# Altium PCB main.PcbDoc (part 1 of 2)
Units mm, origin at the board's own origin, x right, y up, seen from the top; angles counter-clockwise.
Board outline 136 x 119 mm, 2 copper layers (Top Layer, Bottom Layer); 167 components, 134 nets, 513 pads, 251 vias.
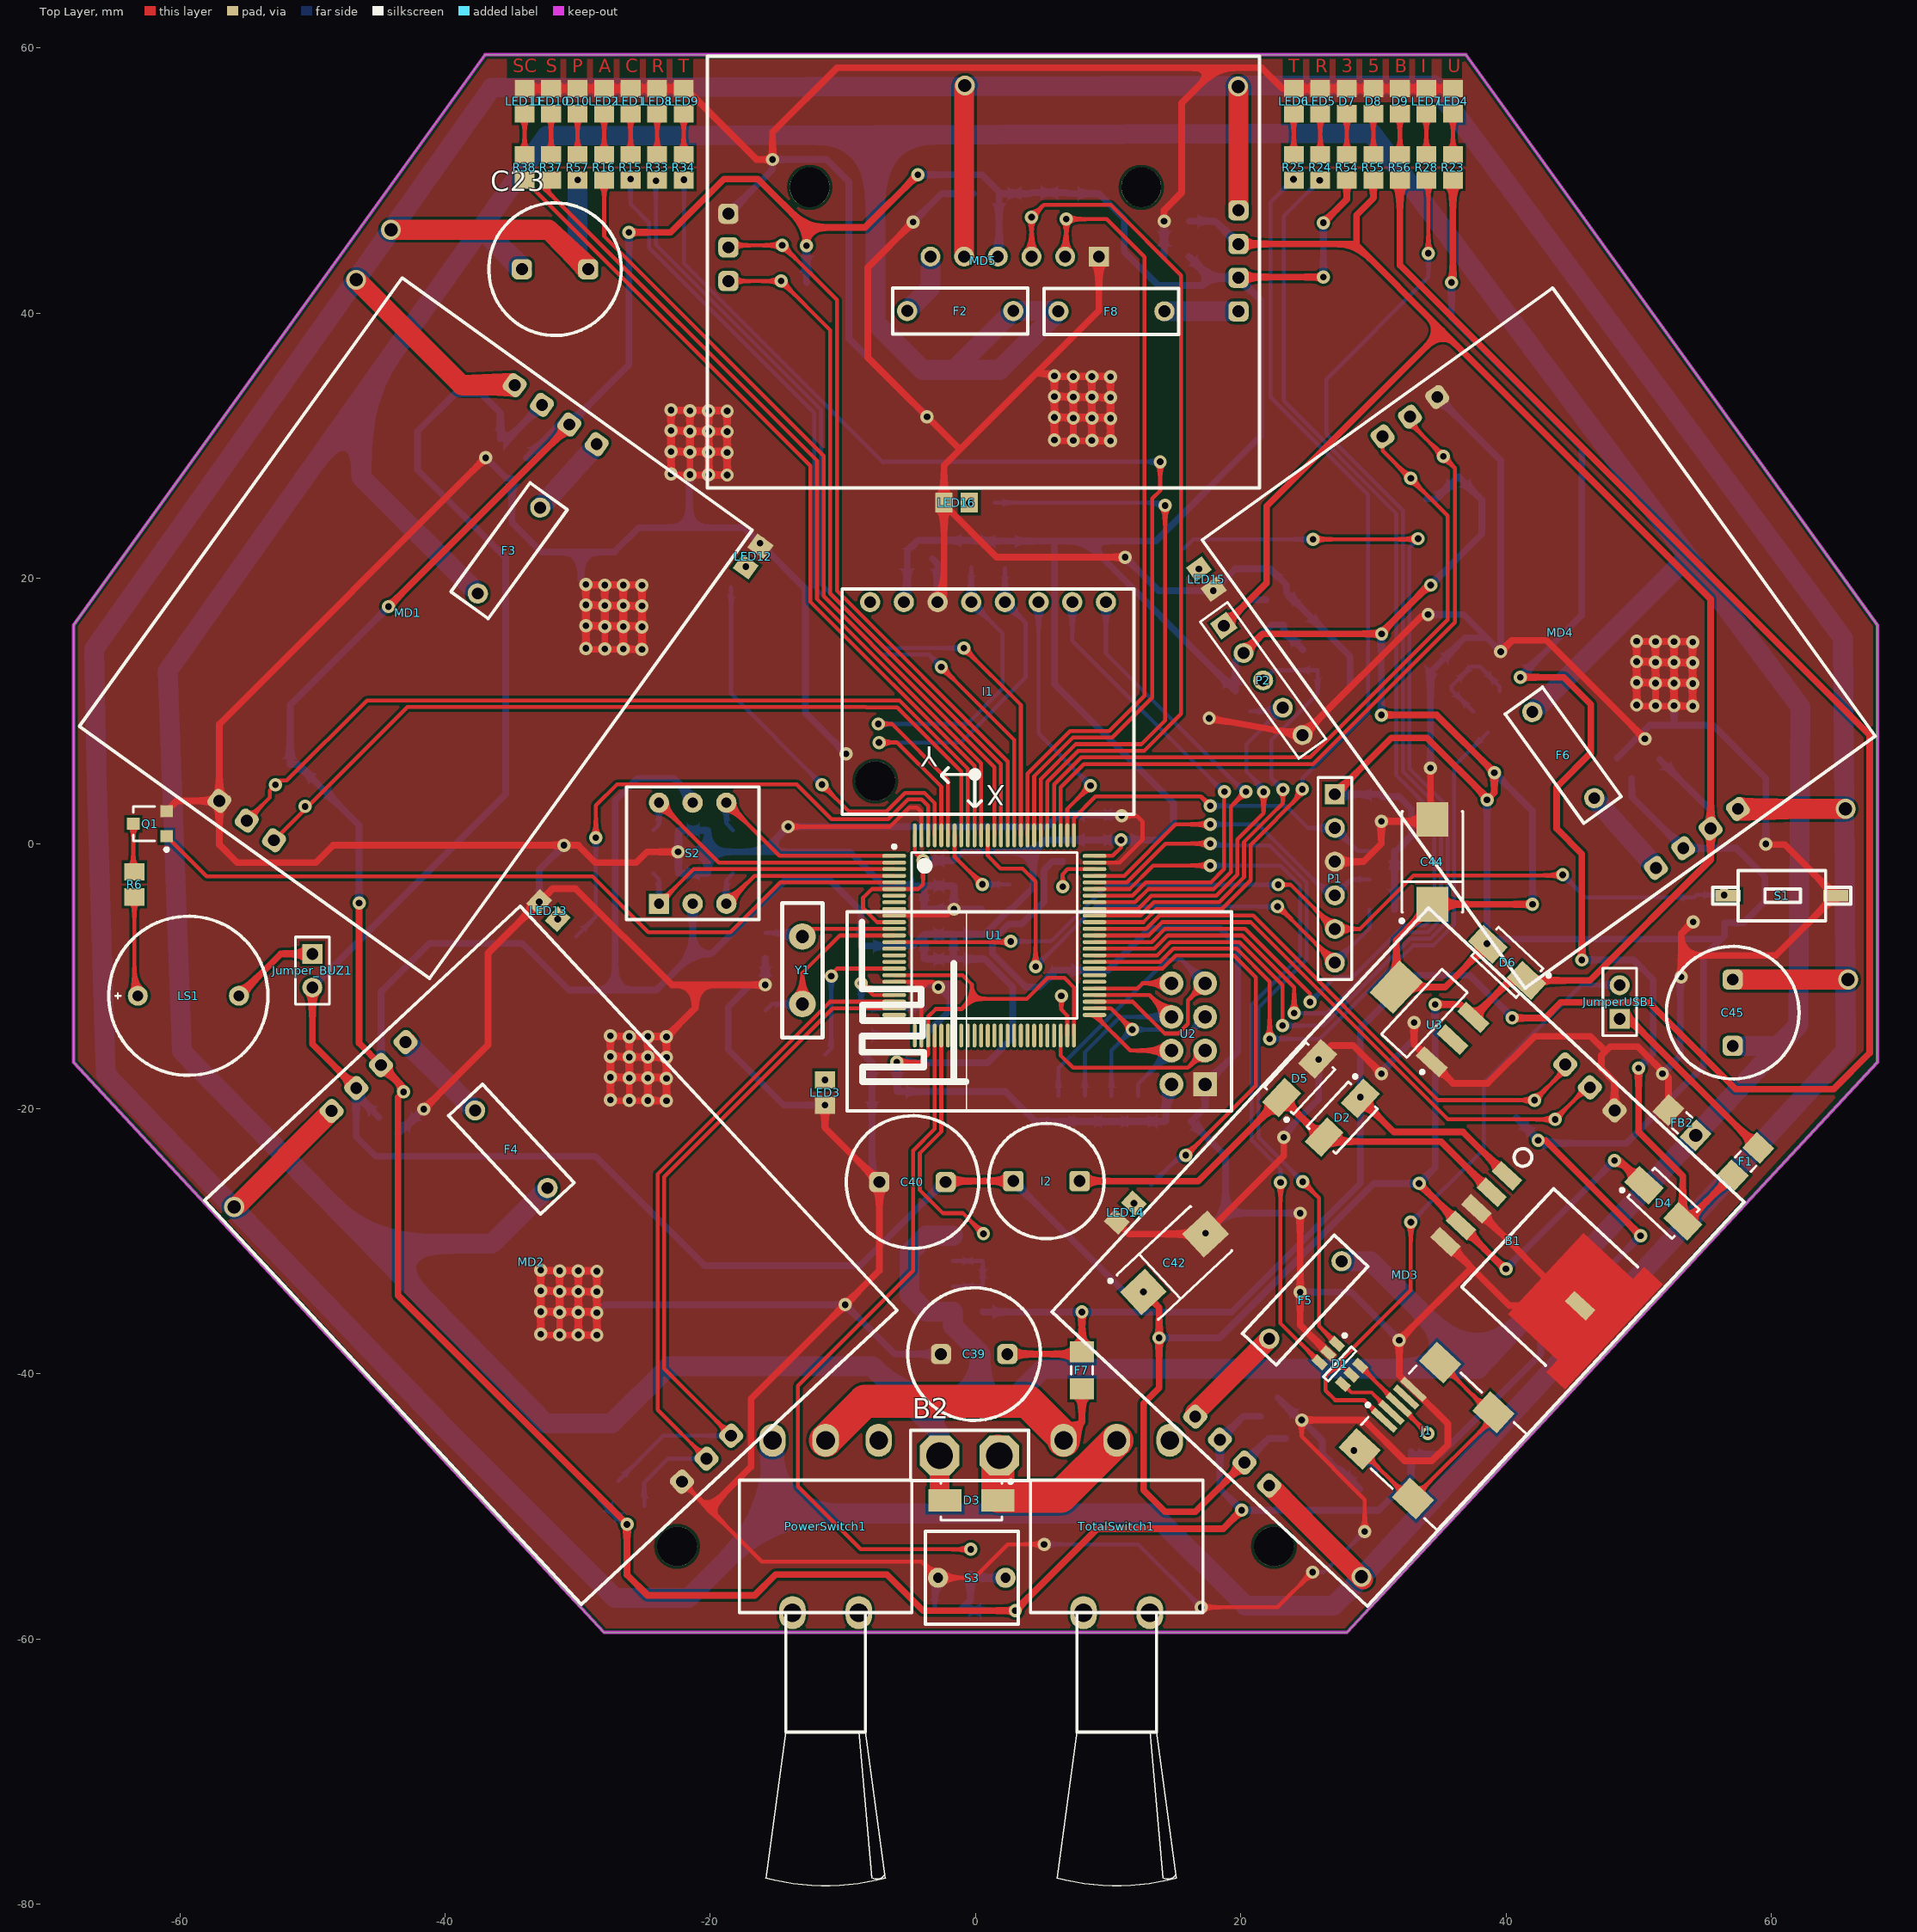
[diagram p0: Top Layer view]
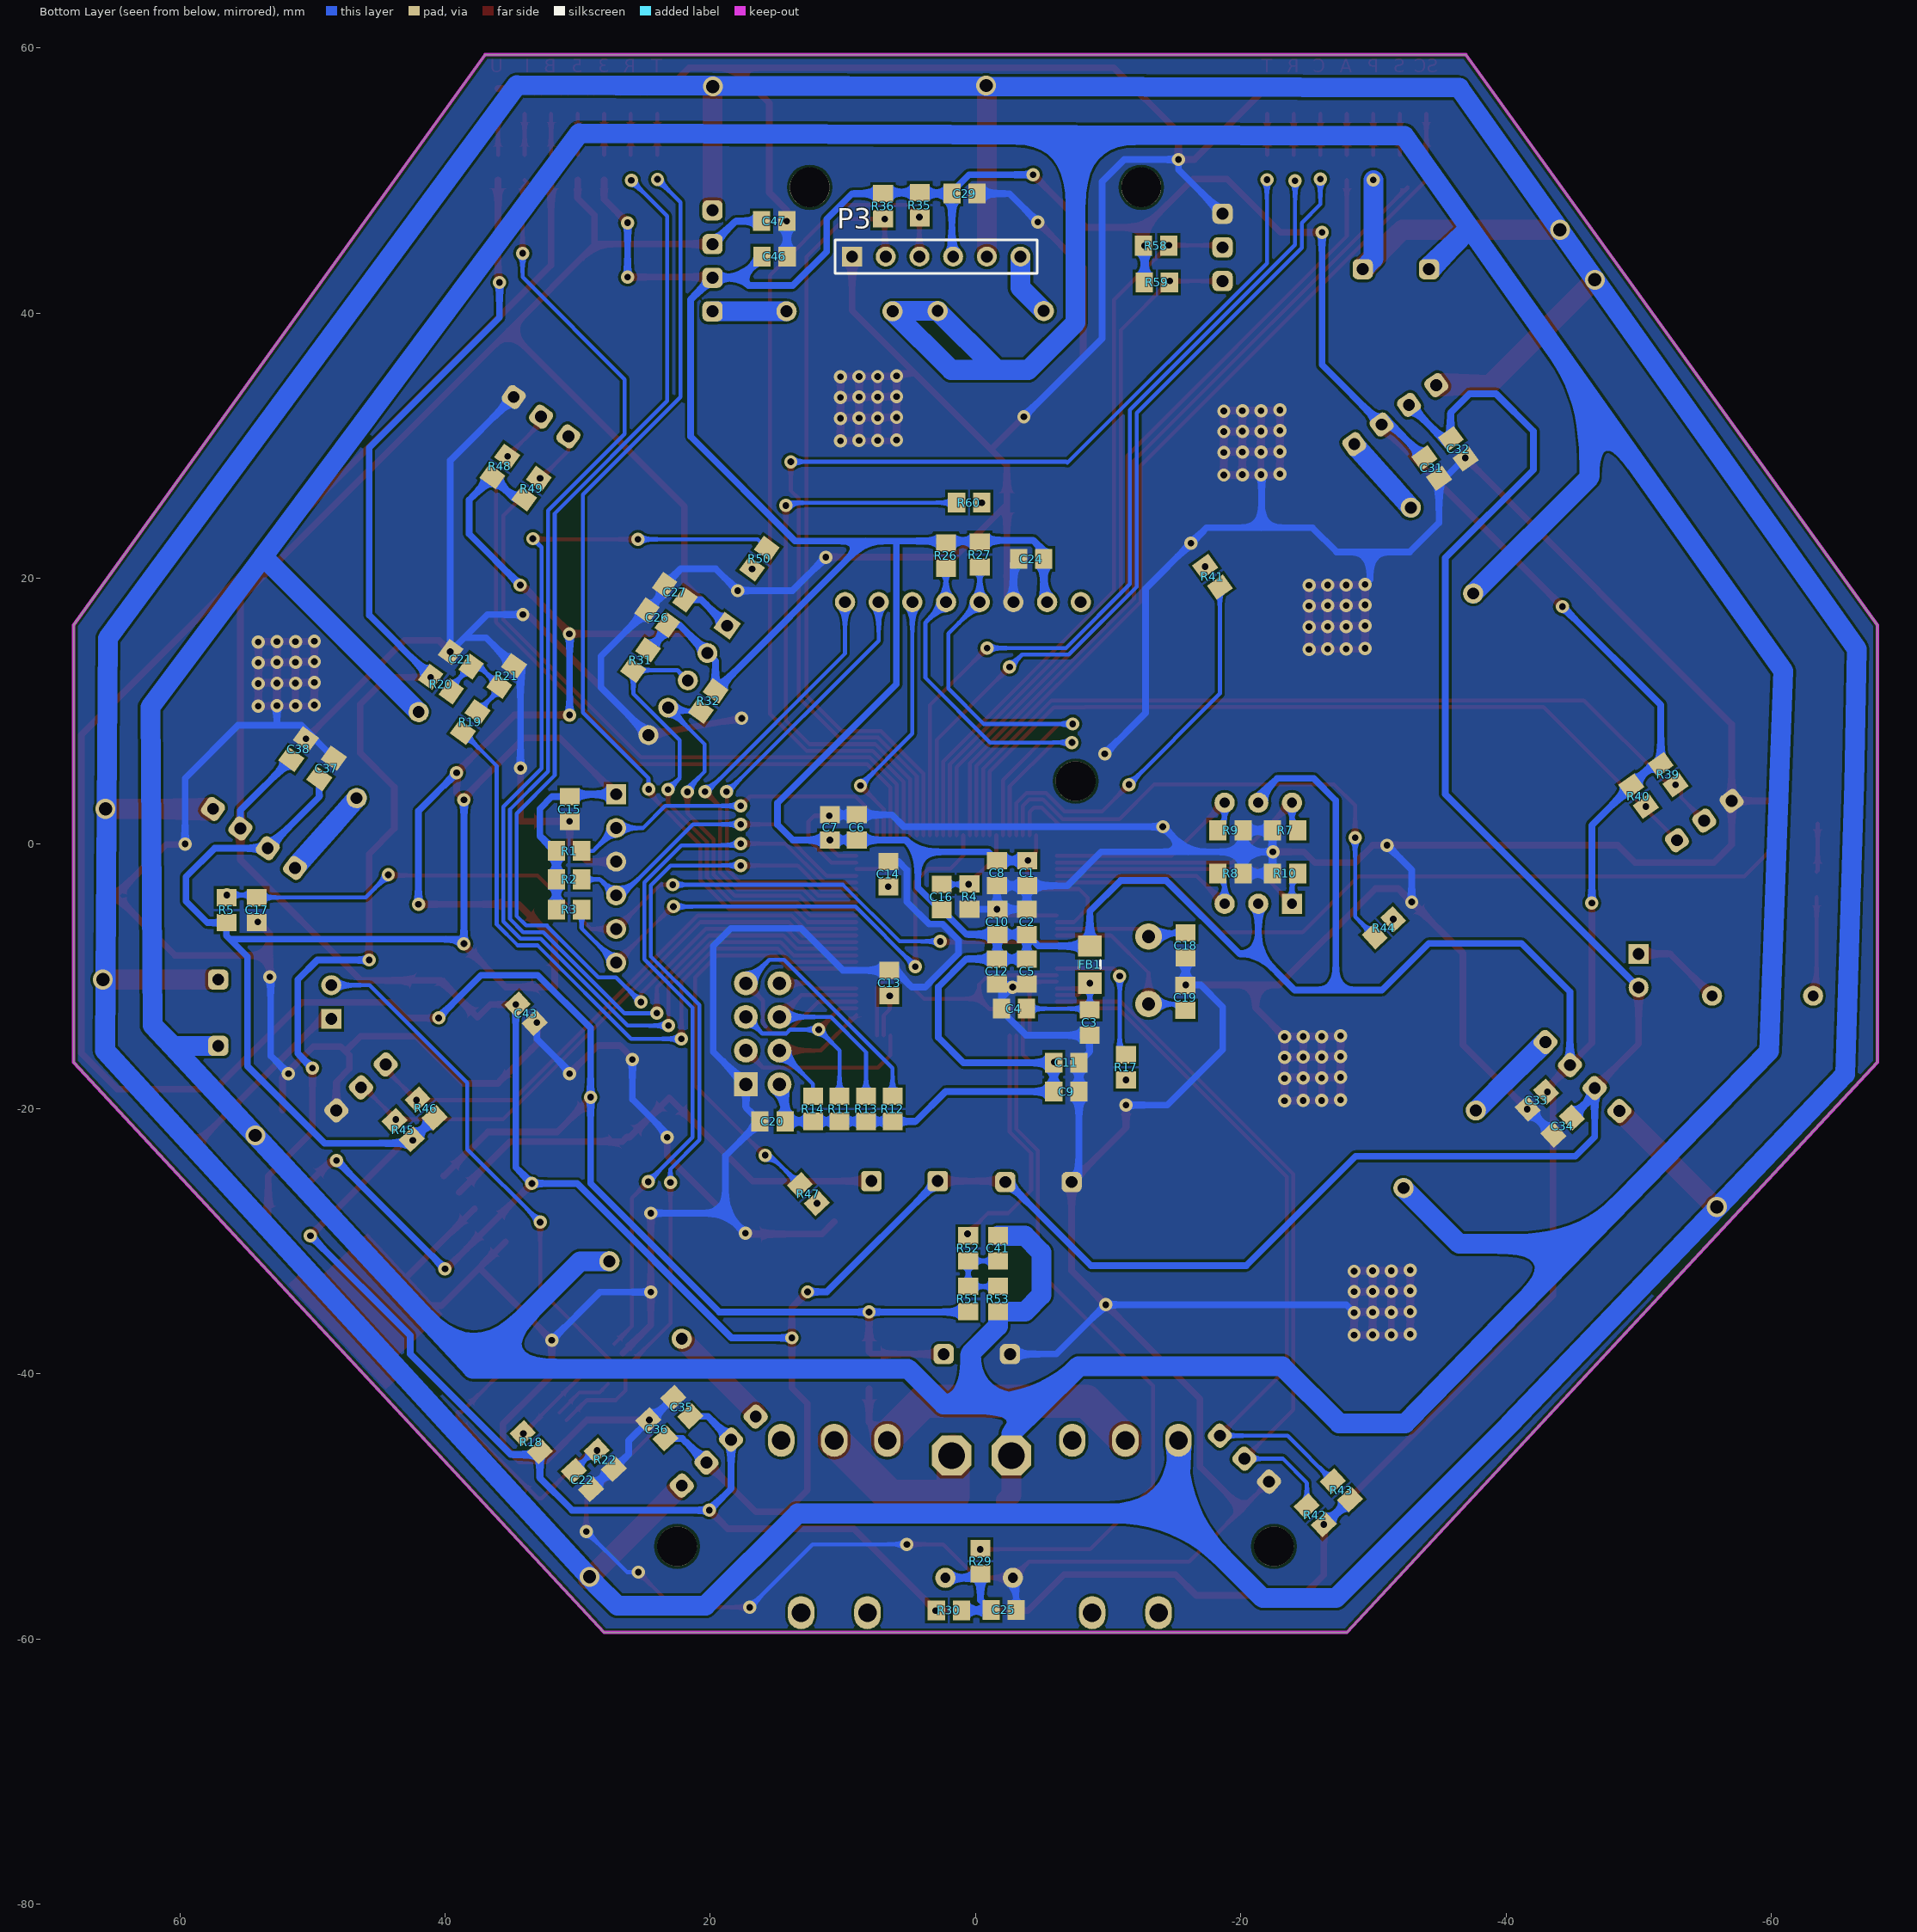
[diagram p1: Bottom Layer view, seen from below]

## Layer stack, top to bottom
Top Solder: solder mask 0.0102, Solder Resist, Dk 3.5
Top Layer: signal copper 0.0356
Dielectric 1: dielectric 0.32, FR-4, Dk 4.8
Bottom Layer: signal copper 0.0356
Bottom Solder: solder mask 0.0102, Solder Resist, Dk 3.5

## Board outline
-68,-16.5 -68,16.5 -36.975,59.5 36.975,59.5 68,16.5 68,-16.5 28,-59.5 -28,-59.5

## Design rules (kind name [scope] priority, off if disabled: settings)
Clearance [All] p1: gap=0.2
ComponentClearance [All] p1 off: gap=0.254 collisioncheckmode=3 verticalgap=0.254 showdistances=FALSE
Height [All] p1 off: minheight=0 maxheight=25.4 prefheight=12.7
PlaneConnect [All] p1: planeconnectstyle=Direct reliefexpansion=0.508 reliefentries=4 reliefconductorwidth=0.254 reliefairgap=0.254
PolygonConnect [All] p1: connectstyle=Direct reliefconductorwidth=0.254 reliefentries=4 polygonreliefangle="90 Angle" airgapwidth=0.254
RoutingVias [All] p1: holewidth=0.5 width=1 viastyle="Through Hole" minholewidth=0.5 minwidth=1 maxholewidth=1 maxwidth=1.5
SolderMaskExpansion [All] p1: expansion=0.102
Width Width_2 [InNet('3.3V')] p1: maxlimit=0.5 minlimit=0.3 preferedwidth=0.5
Width Width_1 [InNet('5V')] p2: maxlimit=0.5 minlimit=0.5 preferedwidth=0.5
Width [All] p3: maxlimit=2.5 minlimit=0.254 preferedwidth=0.254
27 further rules are at their usual default settings.

## Classes and differential pairs
component class Designator: C18 C19 Y1

## Components (designator, comment, footprint, x,y, rotation, side; value= is the part's Value field where it differs from the comment)
B1 "LM2576S-5.0_NOPB" TO170P1435X465-6N 37.767,-27.546 r137 top
B2 "Battry" Battry -0.45,-46.15 r180 top
C1 "Cap_UP" 2012[0805] -3.9,-2.225 r90 bottom
C2 "Cap_UP" 2012[0805] -3.875,-5.9 r270 bottom
C3 "Cap_UP" 2012[0805] -8.6,-13.5 r90 bottom
C4 "Cap_UP" 2012[0805] -2.9,-12.45 r180 bottom
C5 "Cap_UP" 2012[0805] -3.875,-9.65 r90 bottom
C6 "Cap_UP" 2012[0805] 8.95,1.225 r270 bottom
C7 "Cap_UP" 2012[0805] 10.975,1.225 r270 bottom
C8 "Cap_UP" 2012[0805] -1.625,-2.225 r90 bottom
C9 "Cap_UP" 2012[0805] -6.85,-18.7 r0 bottom
C10 "Cap_UP" 2012[0805] -1.65,-5.9 r270 bottom
C11 "Cap_UP" 2012[0805] -6.85,-16.525 r0 bottom
C12 "Cap_UP" 2012[0805] -1.625,-9.65 r90 bottom
C13 "Cap_UP" 2012[0805] 6.5,-10.5 r270 bottom
C14 "Cap_UP" 2012[0805] 6.575,-2.3 r270 bottom
C15 "Cap_UP" 2012[0805] 30.6,2.6 r90 bottom
C16 "Cap_UP" 2012[0805] 2.55,-4.025 r90 bottom
C17 "Cap_UP" 2012[0805] 54.193,-5.013 r90 bottom
C18 "Cap_UP" 2012[0805] -15.85,-7.675 r270 bottom
C19 "Cap_UP" 2012[0805] -15.825,-11.625 r90 bottom
C20 "Cap_UP" 2012[0805] 15.3,-20.95 r180 bottom
C21 "Cap_UP" 2012[0805] 38.8,13.9 r215.75 bottom
C22 "Cap_UP" 2012[0805] 29.625,-48 r47 bottom
C23 "Capacitor" DIPCap -31.7,43.325 r0 top
C24 "Cap_UP" 2012[0805] -4.2,21.475 r180 bottom
C25 "Cap_UP" 2012[0805] -2.125,-57.8 r0 bottom
C26 "Cap_UP" 2012[0805] 24.004,17.045 r215.75 bottom
C27 "Cap_UP" 2012[0805] 22.675,18.95 r215.75 bottom
C29 "Cap_UP" 2012[0805] 0.825,49.025 r0 bottom
C31 "Cap_UP" 2012[0805] -34.4,28.325 r54.25 bottom
C32 "Cap_UP" 2012[0805] -36.4,29.775 r54.25 bottom
C33 "Cap_UP" 2012[0805] -42.325,-19.35 r137 bottom
C34 "Cap_UP" 2012[0805] -44.275,-21.3 r137 bottom
C35 "Cap_UP" 2012[0805] 22.15,-42.5 r227 bottom
C36 "Cap_UP" 2012[0805] 24.025,-44.175 r227 bottom
C37 "Cap_UP" 2012[0805] 48.925,5.675 r305.75 bottom
C38 "Cap_UP" 2012[0805] 51.03,7.129 r305.75 bottom
C39 "Capacitor" DIPCap -0.1,-38.5 r0 top
C40 "Capacitor" DIPCap -4.75,-25.525 r0 top
C41 "Cap_UP" 2012[0805] -1.7,-30.525 r270 bottom
C42 "Cap_El" 7343 15,-31.625 r43 top
C43 "Cap_UP" 2012[0805] 33.875,-12.825 r47 bottom
C44 "Cap_El" 7343 34.45,-1.375 r90 top
C45 "Capacitor" DIPCap 57.1,-12.75 r90 top
C46 "Cap_UP" 2012[0805] 15.15,44.275 r0 bottom
C47 "Cap_UP" 2012[0805] 15.175,46.95 r0 bottom
D1 "PRTR5V0U2X" PRTR5V0U2D 27.45,-39.275 r47 top
D2 "ss14" US1m 27.65,-20.675 r47 top
D3 "ss14" US1m -0.3,-49.525 r0 top
D4 "ss14" US1m 51.875,-27.125 r137 top
D5 "ss14" US1m 24.45,-17.7 r227 top
D6 "ss14" US1m 40.1,-8.95 r317 top
D7 "LED" 2012[0805] 28,56 r90 top
D8 "LED" 2012[0805] 30,56 r90 top
D9 "LED" 2012[0805] 32,56 r90 top
D10 "LED" 2012[0805] -30,56 r90 top
F1 "Fuse" 3216[1206] 58.08,-23.976 r227 top
F2 "Ferrite Bead 6A" f6A -1.15,40.175 r180 top
F3 "Ferrite Bead 6A" f6A -35.175,22.1 r234 top
F4 "Ferrite Bead 6A" f6A -35,-23.05 r313 top
F5 "Ferrite Bead 6A" f6A 24.875,-34.425 r47 top
F6 "Ferrite Bead 6A" f6A 44.325,6.675 r125.75 top
F7 "Fuse" 3216[1206] 8.025,-39.725 r270 top
F8 "Ferrite Bead 6A" f6A 10.25,40.15 r180 top
FB1 "Ferrite Beed" 3216[1206] -8.625,-9.125 r270 bottom
FB2 "Ferrite Beed" 3216[1206] 53.275,-21.05 r317 top
I1 "IMU" IMU 0.95,10.715 r180 top locked
I2 "Tube Inductor" Tube_Inductor 5.35,-25.45 r0 top
J1 "USB_AB" USB_MINI 34.814,-45.019 r47 top
Jumper_BUZ1 "Jumper Buzz" HDR1X2 -50,-8.31 r270 top
JumperUSB1 "Jumper USB" HDR1X2 48.575,-13.215 r90 top
LED1 "LED" 2012[0805] -26,56 r90 top
LED2 "LED" 2012[0805] -28,56 r90 top
LED3 "LED" 2012[0805] -11.35,-18.775 r270 top
LED4 "LED" 2012[0805] 36,56 r90 top
LED5 "LED" 2012[0805] 26,56 r90 top
LED6 "LED" 2012[0805] 24,56 r90 top
LED7 "LED" 2012[0805] 34,56 r90 top
LED8 "LED" 2012[0805] -24,56 r90 top
LED9 "LED" 2012[0805] -22,56 r90 top
LED10 "LED" 2012[0805] -32,56 r90 top
LED11 "LED" 2012[0805] -34,56 r90 top
LED12 "LED" 2012[0805] -16.775,21.65 r54.25 top
LED13 "LED" 2012[0805] -32.2,-5.05 r137 top
LED14 "LED" 2012[0805] 11.302,-27.82 r227 top
LED15 "LED" 2012[0805] 17.4,19.95 r305.75 top
LED16 "LED" 2012[0805] -1.424,25.714 r180 top
LS1 "Buzzer" BUZZER -59.35,-11.475 r0 top
MD1 "STMotorDriver" MotorDriver -42.2,16.25 r234.25 top locked
MD2 "STMotorDriver" MotorDriver -32.025,-31.05 r313 top locked
MD3 "STMotorDriver" MotorDriver 31.85,-31.175 r47 top locked
MD4 "STMotorDriver" MotorDriver 42.475,15.5 r125.75 top locked
MD5 "STMotorDriver" MotorDriver 0.6,43.1 r180 top locked
P1 "Header 6" HDR1X6 27.1,3.72 r270 top
P2 "Header 5" HDR1X5 18.723,16.434 r305.75 top
P3 "Header 6" HDR1X6 9.305,44.275 r180 bottom
PowerSwitch1 "SW-SPDT" KEYKHRAB -11.3,-53 r90 top locked
Q1 "2N2222" SOT-23 -62.25,1.5 r90 top
R1 "Res" 2012[0805] 30.65,-0.55 r0 bottom
R2 "Res" 2012[0805] 30.65,-2.7 r0 bottom
R3 "Res" 2012[0805] 30.65,-4.975 r0 bottom
R4 "Res" 2012[0805] 0.45,-4 r270 bottom
R5 "Res" 2012[0805] 56.475,-5.013 r90 bottom
R6 "Res" 2012[0805] -63.425,-3.075 r270 top
R7 "Res" 2012[0805] -23.35,1 r180 bottom
R8 "Res" 2012[0805] -19.225,-2.25 r0 bottom
R9 "Res" 2012[0805] -19.225,1 r0 bottom
R10 "Res" 2012[0805] -23.35,-2.25 r180 bottom
R11 "Res" 2012[0805] 10.25,-20 r270 bottom
R12 "Res" 2012[0805] 6.25,-20 r270 bottom
R13 "Res" 2012[0805] 8.25,-20 r270 bottom
R14 "Res" 2012[0805] 12.25,-20 r270 bottom
R15 "Res" 2012[0805] -26,51 r90 top
R16 "Res" 2012[0805] -28,51 r90 top
R17 "Res" 2012[0805] -11.35,-16.875 r270 bottom
R18 "Res" 2012[0805] 33.5,-45.15 r47 bottom
R19 "Res" 2012[0805] 38.1,9.175 r125.75 bottom
R20 "Res" 2012[0805] 40.3,12.025 r215.75 bottom
R21 "Res" 2012[0805] 35.35,12.65 r125.75 bottom
R22 "1M" 2012[0805] 27.925,-46.475 r47 bottom
R23 "Res" 2012[0805] 36,51 r90 top
R24 "Res" 2012[0805] 26,51 r90 top
R25 "Res" 2012[0805] 24,51 r90 top
R26 "Res" 2012[0805] 2.225,21.725 r90 bottom
R27 "Res" 2012[0805] -0.325,21.8 r90 bottom
R28 "Res" 2012[0805] 34,51 r90 top
R29 "Res" 2012[0805] -0.375,-54.125 r90 bottom
R30 "Res" 2012[0805] 2,-57.825 r180 bottom
R31 "Res" 2012[0805] 25.25,13.85 r125.75 bottom
R32 "Res" 2012[0805] 20.15,10.75 r125.75 bottom
R33 "Res" 2012[0805] -24,51 r90 top
R34 "Res" 2012[0805] -22,51 r90 top
R35 "Res" 2012[0805] 4.2,48.15 r90 bottom
R36 "Res" 2012[0805] 6.975,48.075 r90 bottom
R37 "Res" 2012[0805] -32,51 r90 top
R38 "Res" 2012[0805] -34,51 r90 top
R39 "Res" 2012[0805] -52.225,5.2 r54.25 bottom
R40 "Res" 2012[0805] -50,3.575 r54.25 bottom
R41 "Res" 2012[0805] -17.875,20.125 r54.25 bottom
R42 "Res" 2012[0805] -25.625,-50.65 r227 bottom
R43 "Res" 2012[0805] -27.6,-48.775 r227 bottom
R44 "Res" 2012[0805] -30.8,-6.35 r137 bottom
R45 "Res" 2012[0805] 43.15,-21.6 r227 bottom
R46 "Res" 2012[0805] 41.425,-19.975 r227 bottom
R47 "Res" 2012[0805] 12.6,-26.425 r227 bottom
R48 "Res" 2012[0805] 35.867,28.45 r305.75 bottom
R49 "Res" 2012[0805] 33.475,26.775 r305.75 bottom
R50 "Res" 2012[0805] 16.29,21.492 r305.75 bottom
R51 "Res" 2012[0805] 0.55,-34.35 r270 bottom
R52 "Res" 2012[0805] 0.55,-30.525 r270 bottom
R53 "Res" 2012[0805] -1.7,-34.35 r90 bottom
R54 "Res" 2012[0805] 28,51 r270 top
R55 "Res" 2012[0805] 30,51 r270 top
R56 "Res" 2012[0805] 32,51 r270 top
R57 "Res" 2012[0805] -30,51 r270 top
R58 "Res" 2012[0805] -13.625,45.1 r0 bottom
R59 "Res" 2012[0805] -13.675,42.325 r0 bottom
R60 "Res" 2012[0805] 0.476,25.714 r180 bottom
S1 "SW-SPST" SW-SMD 60.8,-3.925 r0 top
S2 "Hex_Switch" SW-HEX -21.325,-0.725 r0 top locked
S3 "SW-SPST" PUSH-BUT -0.275,-55.375 r90 top
TotalSwitch1 "SW-SPDT" KEYKHRAB 10.65,-53 r90 top locked
U1 "STM32F407VGT6" STM-LQFP100_N 1.425,-6.925 r0 top locked
U2 "nrf24L01" NRF24L01 17.315,-18.15 r180 top locked
U3 "LM1117DT-3.3" SOT223 33.85,-12.8 r137 top
Y1 "XTAL" XTALL -13.05,-9.55 r0 top

## Footprints (in the part's own frame and the unit in brackets; to place one, negate y for a bottom-side part, rotate by r counter-clockwise, add the part's x,y. Pads: shape width x height; smd on the part's side, far side on the other; paste and mask are expansions set on the pad)
2012[0805] [mm] "Chip Resistor; Body 2.0 x 1.3 mm (LxW typ)"
  rect 1.3x1.5 smd: 1(-0.95,0) 2(0.95,0)
  body extent -1.22,-0.75 1.28,0.75, height 0.5
3216[1206] [mm] "Chip Resistor; Body 3.2 x 1.6 mm (LxW typ)"
  rect 1.6x1.8 smd: 1(-1.4,0) 2(1.4,0)
  silkscreen extent -0.3,-0.8 0.3,0.8, body extent -1.87,-0.9 1.85,0.9, height 0.5
7343 [mm] "Capacitor, SM Tantalum; Body 7.3 x 4.3 mm (LxW typ)"
  rect 2.6x2.4 smd: 1(-3.2,0) 2(3.2,0)
  silkscreen extent -4.57,-2.3 3.8,2.42, body extent -3.9,-2.4 3.9,2.4, height 2
Battry [mm] "Battry"
  oct 3x3 hole 2: +(-2.25,0) -(2.25,0)
  silkscreen extent -4.44,-1.91 4.44,1.91
BUZZER [mm]
  round 1.5 hole 0.8: 1(-3.81,0) 2(3.81,0)
  silkscreen extent -6,-6 6,6, body extent -5.97,-6 5.97,5.97, height 9.3
DIPCap [mm]
  rrect50% 1.524x1.524 hole 0.9: +(2.5,0) -(-2.5,0)
  silkscreen extent -5,-5 5,5, body extent -5,-5 5,5, height 16
f6A [mm] "ferrite Bead 6A"
  round 1.524 hole 0.9: 0(-4,0) 1(4,0)
  silkscreen extent -5.08,-1.72 5.08,1.75, body extent -2.87,-1.72 3.13,1.78, height 3.5
HDR1X2 [mm] "Connector; Header; 2 Position"
  rect 1.5x1.5 hole 0.9: 1(0,0)
  round 1.5 hole 0.9: 2(2.54,0)
  silkscreen extent -1.27,-1.27 3.81,1.27
HDR1X5 [mm] "Connector; Header; 5 Position"
  rect 1.5x1.5 hole 0.9: 1(0,0)
  round 1.5 hole 0.9: 2(2.54,0) 3(5.08,0) 4(7.62,0) 5(10.16,0)
  silkscreen extent -1.27,-1.27 11.43,1.27
HDR1X6 [mm] "Connector; Header; 6 Position"
  rect 1.5x1.5 hole 0.9: 1(0,0)
  round 1.5 hole 0.9: 2(2.54,0) 3(5.08,0) 4(7.62,0) 5(10.16,0) 6(12.7,0)
  silkscreen extent -1.27,-1.27 13.97,1.27
IMU [mm]
  round 1.524 hole 0.9: 0(8.89,-7.5) 1(6.35,-7.5) 2(3.81,-7.5) 3(1.27,-7.5) 4(-1.27,-7.5) 5(-3.81,-7.5) 6(-6.35,-7.5) 7(-8.89,-7.5)
  round 3 hole 3: 8(8.5,6)
  silkscreen extent -11,-8.5 11,8.5
KEYKHRAB [mm]
  oval 2.5x2 hole 1.4: 0(-5,-2.5) 0(-5,2.5) 1(8,4) 2(8,0) 3(8,-4)
  silkscreen extent -25.59,-6.5 5,6.5, body extent -25.6,-6.5 4.97,6.5, height 8
MotorDriver [mm] "KN2C SSLTeam MotorDriver"
  rrect50% 1.524x1.524 hole 0.9: 0(-19.228,2.96) 1(-19.228,0.42) 2(-19.228,-2.12) 3(-19.228,-4.66) 4(19.228,0.67) 5(19.228,-1.87) 6(19.228,-4.41)
  silkscreen extent -20.83,-16.27 20.83,16.27, body extent -20.95,-16.13 20.96,16.38, height 30
NRF24L01 [mm]
  rect 1.8x1.8 hole 1: 1(0,0)
  round 1.8 hole 1: 2(2.54,0) 3(0,-2.54) 4(2.54,-2.54) 5(0,-5.08) 6(2.54,-5.08) 7(0,-7.62) 8(2.54,-7.62)
  silkscreen extent -2,-13 27,2
PRTR5V0U2D [mm]
  rect 0.65x1.1 smd: 1(0.987,1.204) 2(0.037,1.204) 3(-0.913,1.204) 4(-0.913,-1.196) 5(0.037,-1.196) 6(0.987,-1.196)
  silkscreen extent -1.51,-0.25 1.99,1.33, body extent -1.51,-0.9 1.59,0.9, height 1.1
PUSH-BUT [mil]
  round 60 hole 30: 1(0,-100) 2(0,100)
  silkscreen extent -138,-138 138,138, body extent -139,-139 139,139, height 157
SOT223 [mm] "SOT223, 4-Leads, Body 6.7x7.3mm (max), Pitch 2.30mm, IPC Medium Density"
  rect 2.4x1 smd: 1(-2.9,2.3) 2(-2.9,0) 3(-2.9,-2.3)
  rect 2.4x3.3 smd: 4(2.9,0)
  silkscreen extent -3.02,-3.35 1.3,3.47, body extent -1.85,-3.35 1.85,3.35, height 1.8
SOT-23 [mm] "SOT-23; 3 Leads; Body 3.0 x 2.6 mm, inc. leads (LxW max)"
  rect 0.9x0.95 smd: 1(0,1.25) 2(-0.95,-1.25) 3(0.95,-1.25)
  silkscreen extent -2.07,-1.38 1.3,1.25, body extent -1.33,-0.38 1.33,1.25, height 2
STM-LQFP100_N [mm] "Thin QFP, 100-Leads, Body 14x14mm, Pitch 0.5mm, IPC Medium Density"
  oval 1.8x0.3 smd: 1(-7.55,6) 2(-7.55,5.5) 3(-7.55,5) 4(-7.55,4.5) 5(-7.55,4) 6(-7.55,3.5) 7(-7.55,3) 8(-7.55,2.5) 9(-7.55,2) 10(-7.55,1.5) 11(-7.55,1) 12(-7.55,0.5) 13(-7.55,0) 14(-7.55,-0.5) 15(-7.55,-1) 16(-7.55,-1.5) 17(-7.55,-2) 18(-7.55,-2.5) 19(-7.55,-3) 20(-7.55,-3.5) 21(-7.55,-4) 22(-7.55,-4.5) 23(-7.55,-5) 24(-7.55,-5.5) 25(-7.55,-6) 51(7.55,-6) 52(7.55,-5.5) 53(7.55,-5) 54(7.55,-4.5) 55(7.55,-4) 56(7.55,-3.5) 57(7.55,-3) 58(7.55,-2.5) 59(7.55,-2) 60(7.55,-1.5) 61(7.55,-1) 62(7.55,-0.5) 63(7.55,0) 64(7.55,0.5) 65(7.55,1) 66(7.55,1.5) 67(7.55,2) 68(7.55,2.5) 69(7.55,3) 70(7.55,3.5) 71(7.55,4) 72(7.55,4.5) 73(7.55,5) 74(7.55,5.5) 75(7.55,6)
  oval 0.3x1.8 smd: 26(-6,-7.55) 27(-5.5,-7.55) 28(-5,-7.55) 29(-4.5,-7.55) 30(-4,-7.55) 31(-3.5,-7.55) 32(-3,-7.55) 33(-2.5,-7.55) 34(-2,-7.55) 35(-1.5,-7.55) 36(-1,-7.55) 37(-0.5,-7.55) 38(0,-7.55) 39(0.5,-7.55) 40(1,-7.55) 41(1.5,-7.55) 42(2,-7.55) 43(2.5,-7.55) 44(3,-7.55) 45(3.5,-7.55) 46(4,-7.55) 47(4.5,-7.55) 48(5,-7.55) 49(5.5,-7.55) 50(6,-7.55) 76(6,7.55) 77(5.5,7.55) 78(5,7.55) 79(4.5,7.55) 80(4,7.55) 81(3.5,7.55) 82(3,7.55) 83(2.5,7.55) 84(2,7.55) 85(1.5,7.55) 86(1,7.55) 87(0.5,7.55) 88(0,7.55) 89(-0.5,7.55) 90(-1,7.55) 91(-1.5,7.55) 92(-2,7.55) 93(-2.5,7.55) 94(-3,7.55) 95(-3.5,7.55) 96(-4,7.55) 97(-4.5,7.55) 98(-5,7.55) 99(-5.5,7.55) 100(-6,7.55)
  silkscreen extent -7.67,-6.25 6.25,6.82, body extent -7,-7 7,7, height 1.6
SW-HEX [mil]
  rect 60x60 hole 30: 1(-100,-150)
  round 60 hole 30: 2(0,-150) 3(100,-150) 4(100,150) 5(0,150) 6(-100,150)
  silkscreen extent -197,-197 197,197, body extent -198,-199 195,197, height 79
SW-SMD [mil]
  rect 75x35 smd: 1(-160,0) 2(160,0)
  silkscreen extent -205,-75 205,75
TO170P1435X465-6N [mm]
  rect 2.16x1.07 smd: 1(0,-3.4) 2(0,-1.7) 3(0,0) 4(0,1.7) 5(0,3.4) 6(-10.71,0)
  Top Layer region: -7.18,-4.17 -12.26,-4.17 -12.26,-5.41 -14.17,-5.41 -14.17,5.4 -12.26,5.4 -12.26,4.16 -7.18,4.16 -7.18,-4.17
  silkscreen extent -11.89,-5.9 0.75,5.07
Tube_Inductor [mm]
  rrect30% 1.524x1.524 hole 0.9: 0(2.5,0) 1(-2.5,0)
  silkscreen extent -4.35,-4.35 4.35,4.35, body extent -4.35,-4.35 4.35,4.35, height 10
US1m [mm] "Molded Diode, 2-Leads, Body 4.3x2.6mm, IPC Medium Density"
  rect 2.5x1.7 smd: 1(-2,0) 2(2,0)
  silkscreen extent -2.3,-1.5 3.07,1.52, body extent -2.3,-1.46 2.3,1.46, height 2.3
USB_MINI [mm]
  rect 0.5x2.3 smd: 1(-1.6,3.95) 2(-0.8,3.95) 3(0,3.95) 4(0.8,3.95) 5(1.6,3.95)
  rect 2x2.5 smd: 6(4.45,3.85) 7(4.45,-1.65) 8(-4.45,3.85) 9(-4.45,-1.65)
  silkscreen extent -4.95,-4.6 4.95,5.77
XTALL [mm]
  round 2 hole 1: 1(0,-2.54) 2(0,2.54)
  silkscreen extent -1.52,-5.08 1.52,5.08

## Part data
B1: "SIMPLE SWITCHER 40V, 3A Low Component Count Step-Down Regulator"
C1 C2 C3 C4 C5 C6 C7 C8 C9 C10 C11 C12 C13 C14 C15 C16 C17 C18 C19 C20 C21 C22 C24 C25 C26 C27 C29 C31 C32 C33 C34 C35 C36 C37 C38 C41 C42 C43 C44 C46 C47: "Capacitor"
C23 C39 C40 C45: library part DIPCap
D1: "Double rail-to-rail USB ESD protection diode"
D2 D3 D4 D5 D6: library part "D Schottky", "Schottky Diode"
D7 D8 D9 D10 LED1 LED2 LED3 LED4 LED5 LED6 LED7 LED8 LED9 LED10 LED11 LED12 LED13 LED14 LED15 LED16: library part Diode, "1 Amp General Purpose Rectifier"
F2 F3 F4 F5 F6 F8: library part F6A
I2: library part Tube_Inductor
J1: "Micro USB AB Connector"
Jumper_BUZ1 JumperUSB1: library part "Header 2", "Header, 2-Pin"
LS1: "Magnetic Transducer Buzzer"
P1 P3: "Header, 6-Pin"
P2: "Header, 5-Pin"
PowerSwitch1 TotalSwitch1: "SPDT Subminiature Toggle Switch, Right Angle Mounting, Vertical Actuation"
Q1: "NPN Bipolar Transistor"
R1 R2 R3 R4 R5 R6 R7 R8 R9 R10 R11 R12 R13 R14 R15 R16 R17 R18 R19 R20 R21 R23 R24 R25 R26 R27 R28 R29 R30 R31 R32 R33 R34 R35 R36 R37 R38 R39 R40 R41 R42 R43 R44 R45 R46 R47 R48 R49 R50 R51 R52 R53 R54 R55 R56 R57 R58 R59 R60: "Semiconductor Resistor"
R22: library part Res, "Semiconductor Resistor"
S1 S3: "Single-Pole, Single-Throw Switch"
S2: library part SW-Hex, "SW-Hex"
U1: "ARM Cortex-M4 32-bit MCU+FPU, 210 DMIPS, 1024 kB Flash, 192 kB Internal RAM, 82 I/Os, 100-pin LQFP, -40 to 85 degC, Tray"
U3: "800mA Low-Dropout Linear Regulator, 3-pin TO-252"
Y1: "Crystal Oscillator"

## Free pads (board coordinates)
  round 3 hole 3: 0(-22.5,-53) 0(-12.5,49.5) 0(12.5,49.5) 0(22.5,-53)

## Via types
v1: diameter 1, hole 0.5, Top Layer to Bottom Layer, 242 vias
v2: diameter 1.5, hole 1, Top Layer to Bottom Layer, 9 vias

## Nets (pads, with @x,y where several pads share a name; then routed paths per layer and width w, separated by ;. In a path a pad name is that pad's centre, name@x,y a point inside that pad or via, vN(x,y) a via of type N, cw(c..) or ccw(c..) an arc to the next point about the centre after c; other vN are vias at no path point)
3.3V: C1.2 C2.2 C5.2 C6.2 C7.2 C8.2 C9.2 C10.2 C11.2 C12.2 C15.2 C16.1 C20.2 C24.2 C26.2 C29.2 C31.2 C33.2 C35.2 C37.2 C44.1 C46.2 D6.1 FB1.1 I1.1 MD1.1 MD2.1 MD3.1 MD4.1 MD5.1 P1.1 P2.2 P3.4 R1.2 R2.2 R3.2 R5.1 R11.2 R12.2 R13.2 R14.2 R18.1 R26.2 R27.2 R30.1 R31.2 R32.2 R35.2 R36.2 R39.2 R40.2 R42.2 R43.2 R45.2 R46.2 R48.2 R49.2 R54.2 R58.2 R59.2 S2.2 S2.5 U1.6 U1.11 U1.19 U1.28 U1.50 U1.75 U1.100 U2.2 U3.4 | length 821.6
  Top Layer w0.3: U1.19@-6.125,-9.925 -0.975,-9.925 -0.275,-10.625 -0.275,-11.7 ; U1.11@-6.125,-5.925 -7.425,-5.925 -8.475,-4.875 -8.475,-4.075 -7.825,-3.425 U1.6@-6.125,-3.425 -4.3,-3.425 -3.95,-3.075 v1(-3.95,-1.275) -4.575,-0.65 U1.100@-4.575,0.625 ; v1(-5.925,-16.475) -4.15,-16.475 -3.575,-15.9 U1.28@-3.575,-14.475 -3.575,-13.05 -3,-12.475 -1.05,-12.475 -0.275,-11.7 ; U1.50@7.425,-14.475 7.425,-10.85 6.7,-10.125 5.45,-10.125 3.875,-11.7 -0.275,-11.7 ; U1.75@8.975,-0.925 10.35,-0.925 10.975,-0.3 v1(10.975,0.275)
  Top Layer w0.5: v1(-46.475,-4.475) -46.475,-15.057 MD2.1@-44.831,-16.701 -43.125,-18.407 v1(-43.125,-18.725) -43.55,-19.15 -43.55,-34.068 v1(-26.273,-51.345) -26.273,-55.152 -24.725,-56.7 -16.65,-56.7 -15.075,-55.125 -6.675,-55.125 -3.95,-57.85 v1(3,-57.85) 9.175,-51.675 18.675,-51.675 v1(20.075,-50.275) ; v1(-44.25,17.875) -30.625,31.5 MD1.1@-30.625,31.61 ; v1(-26.125,46.1) -23,46.1 -18.975,50.125 -16.4,50.125 -12.75,46.475 ; v1(-12.75,45.1) -12.75,46.475 ; v1(-4.35,50.45) -8.325,46.475 -12.75,46.475 ; MD5.1@19.828,42.68 19.873,42.725 v1(26.225,42.725) ; P2.2@20.207,14.373 21.659,15.825 v1(30.625,15.825) 30.625,15.925 34.1,19.4 34.225,19.4 v1(34.325,19.5) ; v1(26.225,46.825) 28,48.6 R54.2@28,50.05 ; P1.1@27.1,3.72 31.355,7.975 34.05,7.975 38.575,3.45 v1(38.575,3.3) 39.125,3.85 v1(39.125,5.35) 34.775,9.7 v1(30.6,9.7) ; D6.1@38.637,-7.586 35.401,-10.822 U3.4@31.729,-10.822 31.729,-7.296 C44.1@34.45,-4.575 v1(42,-4.575) ; v1(42.425,-22.375) 42.95,-22.375 v1(50.15,-29.575)
  Bottom Layer w0.5: v1(-46.475,-4.475) -46.475,1.376 R40.2@-49.445,4.346 -51.07,5.971 R39.2@-51.67,5.971 -51.67,10.455 v1@-44.35,17.775 ; MD2.1@-44.831,-16.701 -44.831,-11.181 -41.175,-7.525 -34.175,-7.525 -30.65,-11.05 -27.175,-11.05 ; C31.2@-33.845,29.096 -31.331,31.61 MD1.1@-30.625,31.61 -26.125,36.11 v1(-26.125,46.1) ; R43.2@-28.248,-49.47 -26.373,-51.345 v1(-26.273,-51.345) ; S2.2@-21.325,-4.535 -21.325,-8.3 ; S2.5@-21.325,3.085 -21.325,3.5 -22.75,4.925 -25.5,4.925 -27.175,3.25 -27.175,-11.05 ; v1(-12.75,45.1) -12.75,42.35 R59.2@-12.725,42.325 ; I1.1@-5.4,18.215 -5.15,18.465 C24.2@-5.15,21.475 -5.15,22.075 -4.35,22.875 -0.35,22.875 -0.3,22.825 5.9,22.825 ; v1(-4.35,50.45) 0.486,50.45 1.775,49.161 C29.2@1.775,49.025 ; C1.2@-3.9,-1.275 C8.2@-1.625,-1.275 -0.975,-0.625 4.35,-0.625 ; P3.4@1.685,44.275 1.775,44.365 C29.2@1.775,49.025 ; U2.2@14.775,-18.15 14.35,-18.575 C20.2@14.35,-20.95 R14.2@12.25,-20.95 R11.2@10.25,-20.95 R13.2@8.25,-20.95 R12.2@6.25,-20.95 4.5,-20.95 2.25,-18.7 C9.2@-5.9,-18.7 C11.2@-5.9,-16.525 0.9,-16.525 2.8,-14.625 2.8,-10.8 0.7,-8.7 C12.2@-1.625,-8.7 ; C46.2@16.1,44.275 17.695,42.68 ; C35.2@21.502,-43.195 20.186,-43.195 MD3.1@18.429,-44.951 18.429,-48.629 v1(20.075,-50.275) 30.425,-50.275 32.852,-47.848 R18.1@32.852,-46.075 ; R31.2@24.695,14.621 23.233,16.083 C26.2@23.233,16.49 22.324,16.49 P2.2@20.207,14.373 19.595,13.761 R32.2@19.595,11.521 8.291,22.825 ; v1@26.175,42.675 v1(26.225,42.725) v1(26.225,46.825) ; P1.1@27.1,3.72 30.43,3.72 C15.2@30.6,3.55 31.925,3.55 32.85,2.625 32.85,0.6 31.7,-0.55 R1.2@31.6,-0.55 R2.2@31.6,-2.7 R3.2@31.6,-4.975 ; v1(30.6,9.7) 30.6,15.8 v1(30.625,15.825) ; R18.1@32.852,-45.845 R18.1@32.852,-46.075 ; R49.2@34.03,26.004 34.747,26.004 R48.2@36.422,27.679 38.175,25.926 38.175,23.35 v1(34.325,19.5) ; v1(38.575,3.3) v1(38.575,-7.55) 38.925,-7.2 56.225,-7.2 ; v1(39.125,5.35) 42,2.475 v1(42,-4.575) ; R46.2@40.777,-20.67 42.402,-22.295 R45.2@42.502,-22.295 42.807,-22.6 49.075,-22.6 54.888,-16.787 54.888,-8.537 56.225,-7.2 ; C37.2@49.48,4.904 49.48,3.538 MD4.1@53.368,-0.35 57.375,-0.35 59.525,-2.5 59.525,-4.35 57.912,-5.963 R5.1@56.475,-5.963 56.475,-6.95 56.225,-7.2 ; v1(50.15,-29.575) 42.619,-37.106 42.619,-38.492 35.035,-46.075 R18.1@32.852,-46.075 ; -27.175,-11.05 -24.075,-11.05 -21.325,-8.3 ; -21.325,-8.3 -19.9,-8.3 -14.375,-2.775 -10.95,-2.775 -8.625,-5.1 FB1.1@-8.625,-7.725 -4.75,-7.725 C2.2@-3.875,-6.85 ; C2.2@-3.875,-6.85 C10.2@-1.65,-6.85 ; C2.2@-3.875,-6.85 C5.2@-3.875,-8.7 C12.2@-1.625,-8.7 ; C10.2@-1.65,-6.85 -1.65,-8.675 C12.2@-1.625,-8.7 ; C10.2@-1.65,-6.85 0.675,-6.85 C16.1@2.55,-4.975 2.686,-4.975 4.35,-3.311 4.35,-0.625 ; C29.2@1.775,49.025 4.125,49.025 R35.2@4.2,49.1 6.9,49.1 R36.2@6.975,49.025 9.3,49.025 11.225,47.1 11.225,44.65 13.775,42.1 17.115,42.1 17.695,42.68 ; 4.35,-0.625 5.25,0.275 C6.2@8.95,0.275 v1(10.975,0.275) 13.775,0.275 14.925,1.425 14.925,3.075 5.972,12.028 5.972,22.753 5.9,22.825 ; 5.9,22.825 8.291,22.825 ; 8.291,22.825 13.6,22.825 21.475,30.7 21.475,41.033 MD5.1@19.828,42.68 17.695,42.68
5V: B1.4 C27.2 C32.2 C34.2 C36.2 C38.2 C40.+ C42.1 C43.2 C47.2 D4.2 D6.2 I2.1 Jumper_BUZ1.2 MD1.2 MD2.2 MD3.2 MD4.2 MD5.2 P2.1 R55.2 U3.3 | length 383.6
  Top Layer w0.5: Jumper_BUZ1.2@-50,-10.85 -50,-15.122 MD2.2@-46.689,-18.433 ; C40.+@-2.25,-25.525 -2.175,-25.45 I2.1@2.85,-25.45 ; v1(12.66,-33.807) 13.85,-34.998 v1(13.85,-37.275) 13.85,-41.05 12.675,-42.225 12.675,-48.775 14.3,-50.4 16.57,-50.4 MD3.2@20.287,-46.683 ; P2.1@18.723,16.434 21.95,19.661 21.95,25.45 35.187,38.687 ; MD5.2@19.828,45.22 28.655,45.22 ; R55.2@30,50.05 30,48.675 28.725,47.4 28.725,45.22 28.655,45.22 ; v1(33.45,-25.631) B1.4@36.608,-28.789 39.894,-32.075 v1(40,-32.075) ; v1(34.669,-12.13) 36.574,-12.13 U3.3@37.54,-13.096 40.321,-10.314 D6.2@41.563,-10.314 46.336,-10.314 55.429,-1.221 MD4.2@55.429,1.134 55.429,18.446 35.187,38.687 ; v1(48.175,-23.9) 48.551,-23.9 D4.2@50.412,-25.761 ; 28.655,45.22 35.187,38.687
  Bottom Layer w0.5: Jumper_BUZ1.2@-50,-10.85 -35.425,3.725 -35.425,21.55 -42.075,28.2 -42.075,31.1 -39.25,33.925 -37.25,33.925 -35.825,32.5 -35.825,30.566 C32.2@-35.845,30.546 -35.234,30.546 MD1.2@-32.687,33.094 ; MD2.2@-46.689,-18.433 MD2.2@-46.689,-18.933 ; C34.2@-44.97,-20.652 MD2.2@-46.689,-18.933 ; C40.+@-2.25,-25.525 -2.4,-25.525 -8.7,-31.825 -20.425,-31.825 -28.675,-23.575 -45.225,-23.575 -46.689,-22.111 MD2.2@-46.689,-18.933 ; I2.1@2.85,-25.45 11.207,-33.807 v1(12.66,-33.807) ; v1(13.85,-37.275) 18.4,-37.275 30.044,-25.631 v1(33.45,-25.631) 34.669,-24.412 v1(34.669,-12.13) C43.2@34.523,-12.13 ; C47.2@16.125,46.95 18.098,46.95 MD5.2@19.828,45.22 ; P2.1@18.723,16.434 20.684,18.395 C27.2@21.904,18.395 ; MD3.2@20.287,-46.683 22.101,-44.87 C36.2@23.377,-44.87 ; v1(40,-32.075) v1(48.175,-23.9) ; C38.2@51.585,6.358 55.429,2.514 MD4.2@55.429,1.134
16V: B1.1 C39.+ D2.2 F7.1 R51.2 R56.2 | length 192.7
  Top Layer w0.5: C39.+@2.4,-38.5 7.85,-38.5 F7.1@8.025,-38.325 v1(8.025,-35.325) ; D2.2@29.014,-19.212 31.552,-21.75 36.777,-21.75 B1.1@40.086,-25.059 ; R56.2@32,50.05 32,43.625 67.423,8.202 67.423,-15.802 64.7,-18.525 57.325,-18.525 50.775,-11.975 44.125,-11.975 42.95,-13.15 v1(40.475,-13.15)
  Bottom Layer w0.5: R51.2@0.55,-35.3 0.575,-35.325 v1(8.025,-35.325) 19.325,-35.325 29.025,-25.625 v1(29.025,-19.125) 29.025,-13.9 33,-9.925 37.275,-9.925 v1@40.55,-13.2
AGND: B2.- C23.- C41.1 C45.- D3.1 F2.0 F3.1 F4.1 F5.1 F6.1 F8.1 FB2.2 R53.1 | length 509.2
  Top Layer w1.5: B2.-@-2.7,-46.15 -2.7,-49.125 D3.1@-2.3,-49.525
  Bottom Layer w1.5: -45.632,-30.187 -36.483,-30.187 F4.1@-32.272,-25.975 ; -39.45,43.325 -39.485,43.29 ; F3.1@-37.526,18.864 -46.287,27.625 -46.287,33.677 ; C23.-@-34.2,43.325 -37.25,46.375 -37.25,46.449 ; B2.-@-2.7,-46.15 -2.7,-44.5 -4.912,-42.288 ; C41.1@-1.7,-29.575 -3.725,-29.575 -4.975,-30.825 -4.975,-34.05 -3.725,-35.3 R53.1@-1.7,-35.3 -1.7,-36.4 0.375,-38.475 0.375,-42.288 ; F5.1@27.603,-31.5 29.8,-31.5 37.9,-39.6 ; F6.1@41.988,9.921 53.699,21.632 53.699,21.68 ; C45.-@57.1,-15.25 60.5,-15.25 62.05,-13.7 ; -46.287,33.677 -60.9,13.025 -59.85,-15.65 -41.001,-34.921 -32.39,-43.725 -27.425,-43.725 -23.125,-39.425 -7.775,-39.425 -4.912,-42.288 ; -46.287,33.677 -39.485,43.29 ; -39.485,43.29 -37.25,46.449 ; -37.25,46.449 -32.348,53.376 -7.55,53.455 ; -7.55,53.455 -7.55,39.3 -3.975,35.725 -1.55,35.725 ; -7.55,53.455 29.875,53.575 53.699,21.68 ; -4.912,-42.288 0.375,-42.288 ; -1.55,35.725 -1.55,35.775 F2.0@2.85,40.175 6.225,40.175 F8.1@6.25,40.15 1.825,35.725 -1.55,35.725 ; 0.375,-42.288 2.412,-42.288 5.1,-39.6 37.9,-39.6 ; 37.9,-39.6 54.303,-22.009 60.591,-15.265 62.05,-13.7 ; 53.699,21.68 62.211,10.284 62.05,-13.7
  other v2: 54.299,-22.005
BOOT: C16.2 R4.1 U1.94 | length 6.6
  Top Layer w0.3: U1.94@-1.575,0.625 -1.575,-0.975 v1(0.525,-3.075)
  Bottom Layer w0.3: v1(0.525,-3.075) C16.2@2.55,-3.075
BUTTON: R29.2 U1.29 | length 53.3
  Top Layer w0.3: U1.29@-3.075,-14.475 -3.075,-21.518 -4.7,-23.143 -4.7,-32.2 -13.4,-40.9 -13.4,-48.475 -8.65,-53.225 v1(-0.35,-53.225)
BUZZER: Q1.2 U1.5 | length 59.4
  Top Layer w0.3: Q1.2@-61,0.55 -57.975,-2.475 -28.875,-2.475 -24.675,-6.675 -18.475,-6.675 -14.725,-2.925 U1.5@-6.125,-2.925
CE: U1.48 U2.3 | length 13.3
  Top Layer w0.3: U1.48@6.425,-14.475 6.425,-15.975 7.35,-16.9 16.025,-16.9 U2.3@17.315,-15.61
CSN: R14.1 U1.51 U2.4 | length 11.4
  Top Layer w0.3: U1.51@8.975,-12.925 11.66,-15.61 U2.4@14.775,-15.61
  Bottom Layer w0.3: R14.1@12.25,-19.05 12.25,-18.135 U2.4@14.775,-15.61
DATAARRIVED: R16.1 U1.88 | length 61.6
  Top Layer w0.3: R16.1@-28,50.05 -28,45.8 -11.45,29.25 -11.45,18.661 -7.85,15.061 -7.85,15.05 1.425,5.775 U1.88@1.425,0.625
DATACORRECT: R15.1 U1.85 | length 63.6
  Top Layer w0.3: v1(-2.575,13.325) 2.925,7.825 U1.85@2.925,0.625
  Bottom Layer w0.3: v1(-26,50.125) -26,48.225 -24.6,46.825 -24.6,44.943 -12.15,32.493 -12.15,19.368 -7.032,14.25 -3.5,14.25 v1(-2.575,13.325)
DEBUGRECEIVE: R33.1 U1.84 | length 64.3
  Top Layer w0.3: v1(-0.875,14.75) 3.425,10.45 U1.84@3.425,0.625
  Bottom Layer w0.3: v1(-24.1,50) -24.1,45.15 -11.65,32.7 -11.65,19.575 -6.825,14.75 v1(-0.875,14.75)
DEBUGSCL: P2.4 R32.1 U1.67 | length 29.6
  Top Layer w0.3: U1.67@8.975,-4.925 12.248,-4.925 13.248,-3.925 18.164,-3.925 19.75,-2.339 19.75,0.325 21.725,2.3 v1(21.725,3.9) v1@21.85,3.775
  Bottom Layer w0.3: R32.1@20.705,9.979 P2.4@22.904,9.979 ; v1@21.725,3.65 v1(21.725,3.9) 21.725,4.125 20.425,5.425 20.425,7.5 P2.4@22.904,9.979 ; P2.4@23.175,10.25 P2.4@22.904,9.979
DEBUGSDA: P2.3 R31.1 U1.66 | length 35.6
  Top Layer w0.3: U1.66@8.975,-5.425 12.455,-5.425 13.455,-4.425 18.371,-4.425 20.25,-2.546 20.25,0.118 22.225,2.093 22.225,2.1 23.175,3.05 v1(23.175,4.075)
  Bottom Layer w0.3: P2.3@21.691,12.311 22.459,13.079 R31.1@25.805,13.079 25.805,11.305 22.3,7.8 22.3,4.95 v1(23.175,4.075)
DEBUGTRANSMIT: R34.1 U1.82 | length 82.3
  Top Layer w0.3: U1.82@4.425,0.625 4.425,5.078 7.347,8 10.3,8 13.325,11.025 13.325,26.025 13.925,26.625 v1(13.925,28.8)
  Bottom Layer w0.3: v1(-21.975,50.075) -21.975,43.775 -6.925,28.725 -6.85,28.8 v1(13.925,28.8)
DM: D1.3 U1.70 | length 56.5
  Top Layer w0.3: U1.70@8.975,-3.425 11.627,-3.425 13.402,-1.65 v1(17.7,-1.65) ; v1(23,-25.55) 23,-36.175 D1.3@25.947,-39.122
  Bottom Layer w0.3: v1(17.7,-1.65) 22.986,-1.65 24.475,-3.139 24.475,-8.518 20.825,-12.168 20.825,-22.357 23,-24.532 v1(23,-25.55)
DP: D1.1 U1.71 | length 57.2
  Top Layer w0.3: U1.71@8.975,-2.925 11.42,-2.925 14.345,0 v1(17.7,0) ; v1(24.675,-25.5) 25.9,-26.725 25.9,-36.389 D1.1@27.243,-37.732
  Bottom Layer w0.3: v1(17.7,0) 17.825,-0.125 22.168,-0.125 24.975,-2.932 24.975,-8.725 21.325,-12.375 21.325,-22.15 v1(24.675,-25.5)
DRDY: I1.7 U1.68 | length 36.6
  Top Layer w0.3: U1.68@8.975,-4.425 12.041,-4.425 13.041,-3.425 17.957,-3.425 19.25,-2.132 19.25,2.775 v1(20.4,3.925)
  Bottom Layer w0.3: I1.7@9.84,18.215 9.84,14.335 20.212,3.963 20.175,3.925 v1(20.4,3.925)
F3.3V: C3.2 C4.2 FB1.2 U1.21 U1.22 | length 11.8
  Top Layer w0.3: v1(-8.625,-10.525) -8.225,-10.925 ; U1.22@-6.125,-11.425 -7.725,-11.425 -8.225,-10.925 ; U1.21@-6.125,-10.925 -8.225,-10.925
  Bottom Layer w0.3: v1(-8.625,-10.525) -8.625,-12.525 C3.2@-8.6,-12.55 -8.5,-12.45 C4.2@-3.85,-12.45
FSYNC: I1.5 U1.77 | length 19.9
  Top Layer w0.3: U1.77@6.925,0.625 6.925,2.625 v1(8.675,4.375)
  Bottom Layer w0.3: I1.5@4.76,18.215 4.76,8.29 v1(8.675,4.375)